# Altium PCB HT82V72_DEMOBOARD_V1_1.PcbDoc (part 1 of 2)
Units mil, origin at the board's own origin, x right, y up, seen from the top; angles counter-clockwise.
Board outline 2755.91 x 2047.24 mil, 4 copper layers (Top, 2-GND, 3-POWER, Bottom), stack 35.4 mil thick; 149 components, 103 nets, 424 pads, 256 vias.
Unrouted connection lines stored in the file: 3.
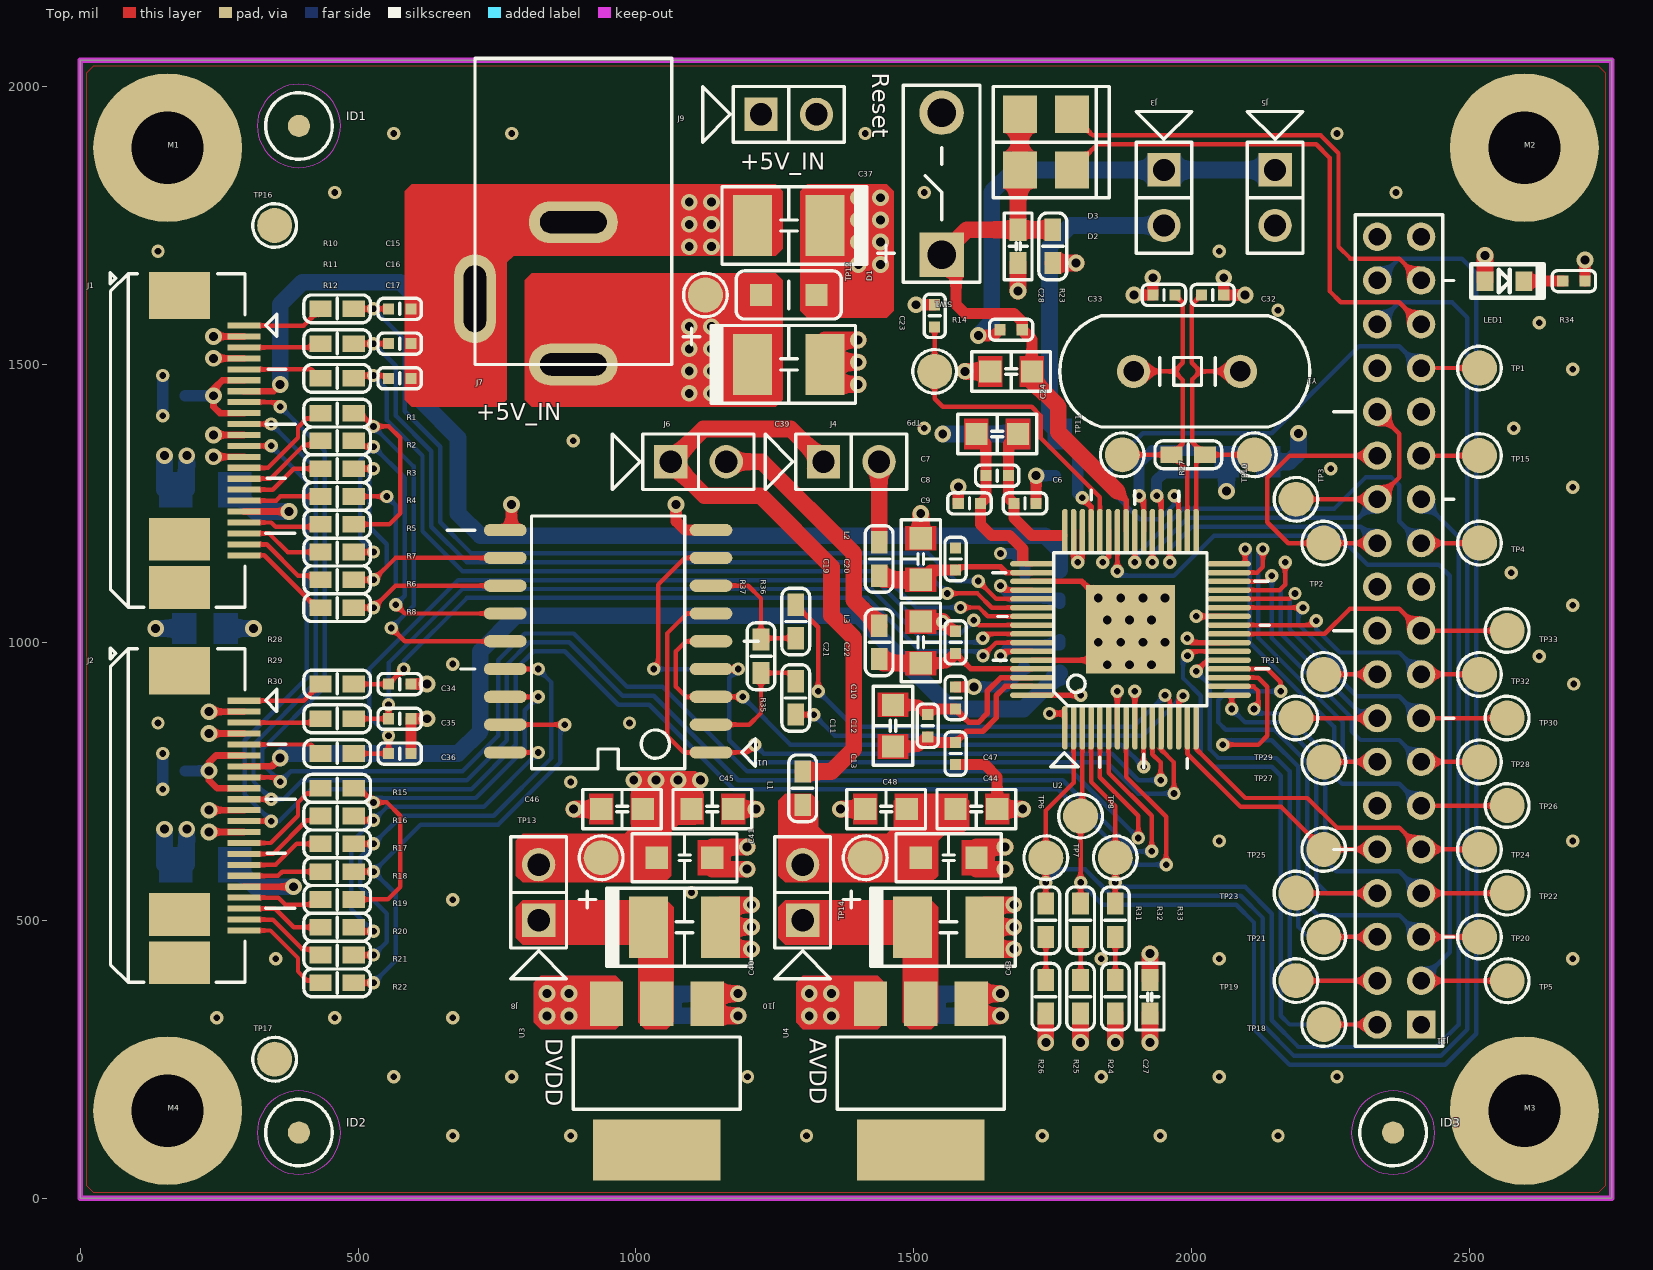
[diagram p0: Top view]
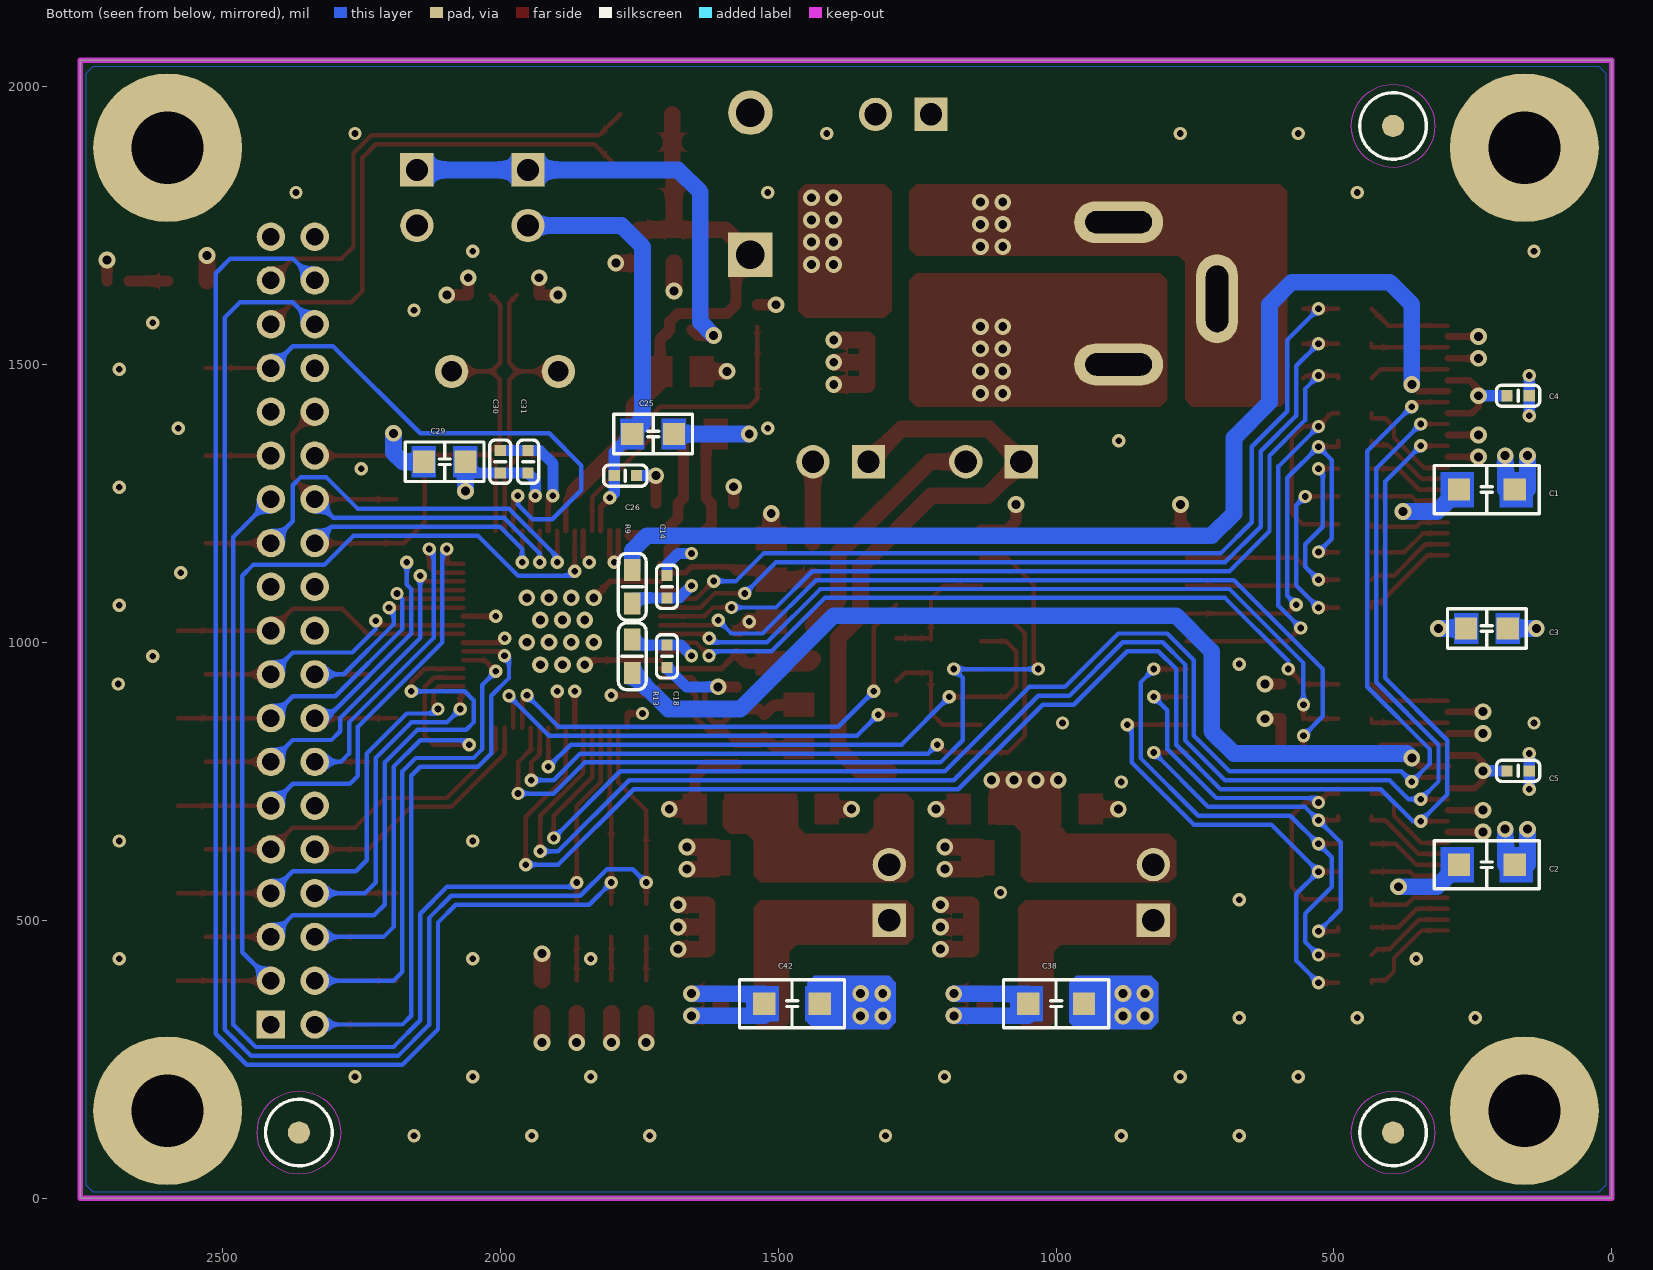
[diagram p1: Bottom view, seen from below]
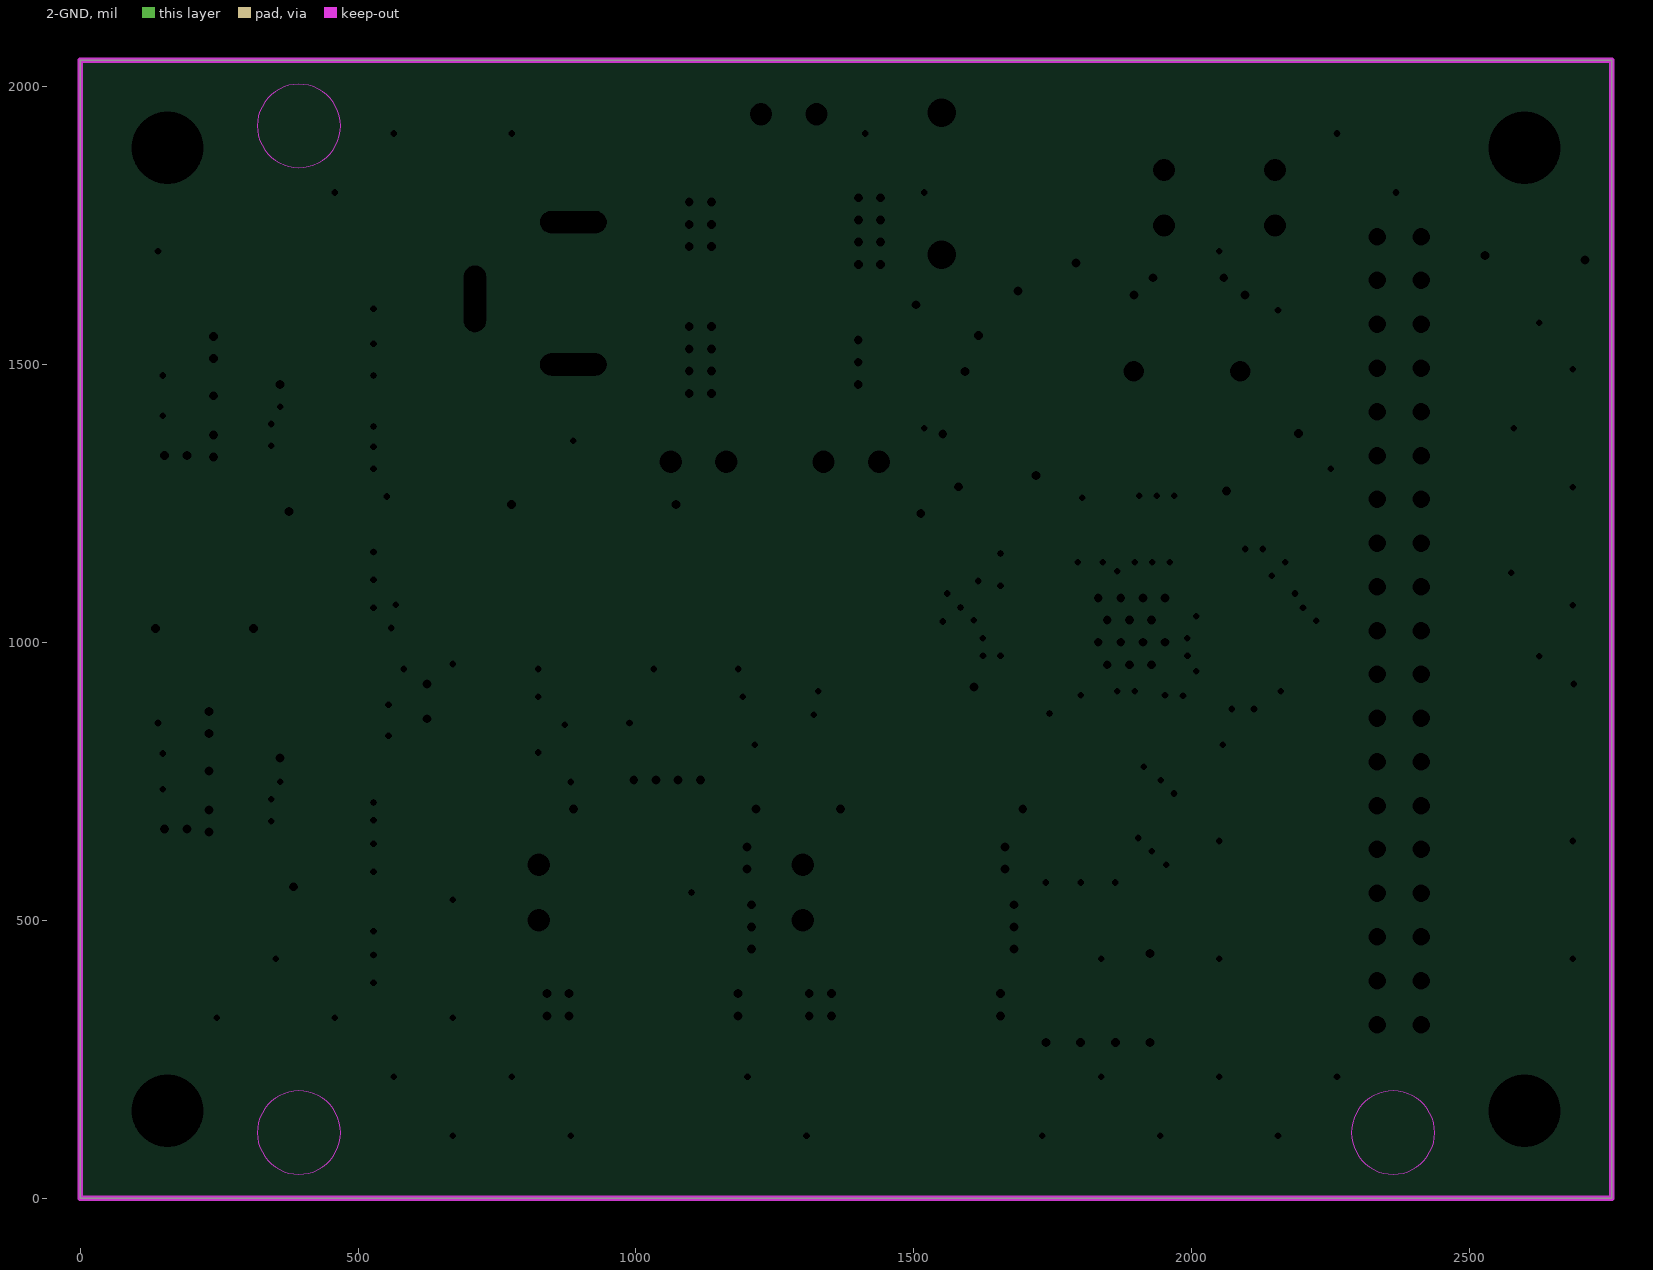
[diagram p2: 2-GND, clearances drawn from the general rule]
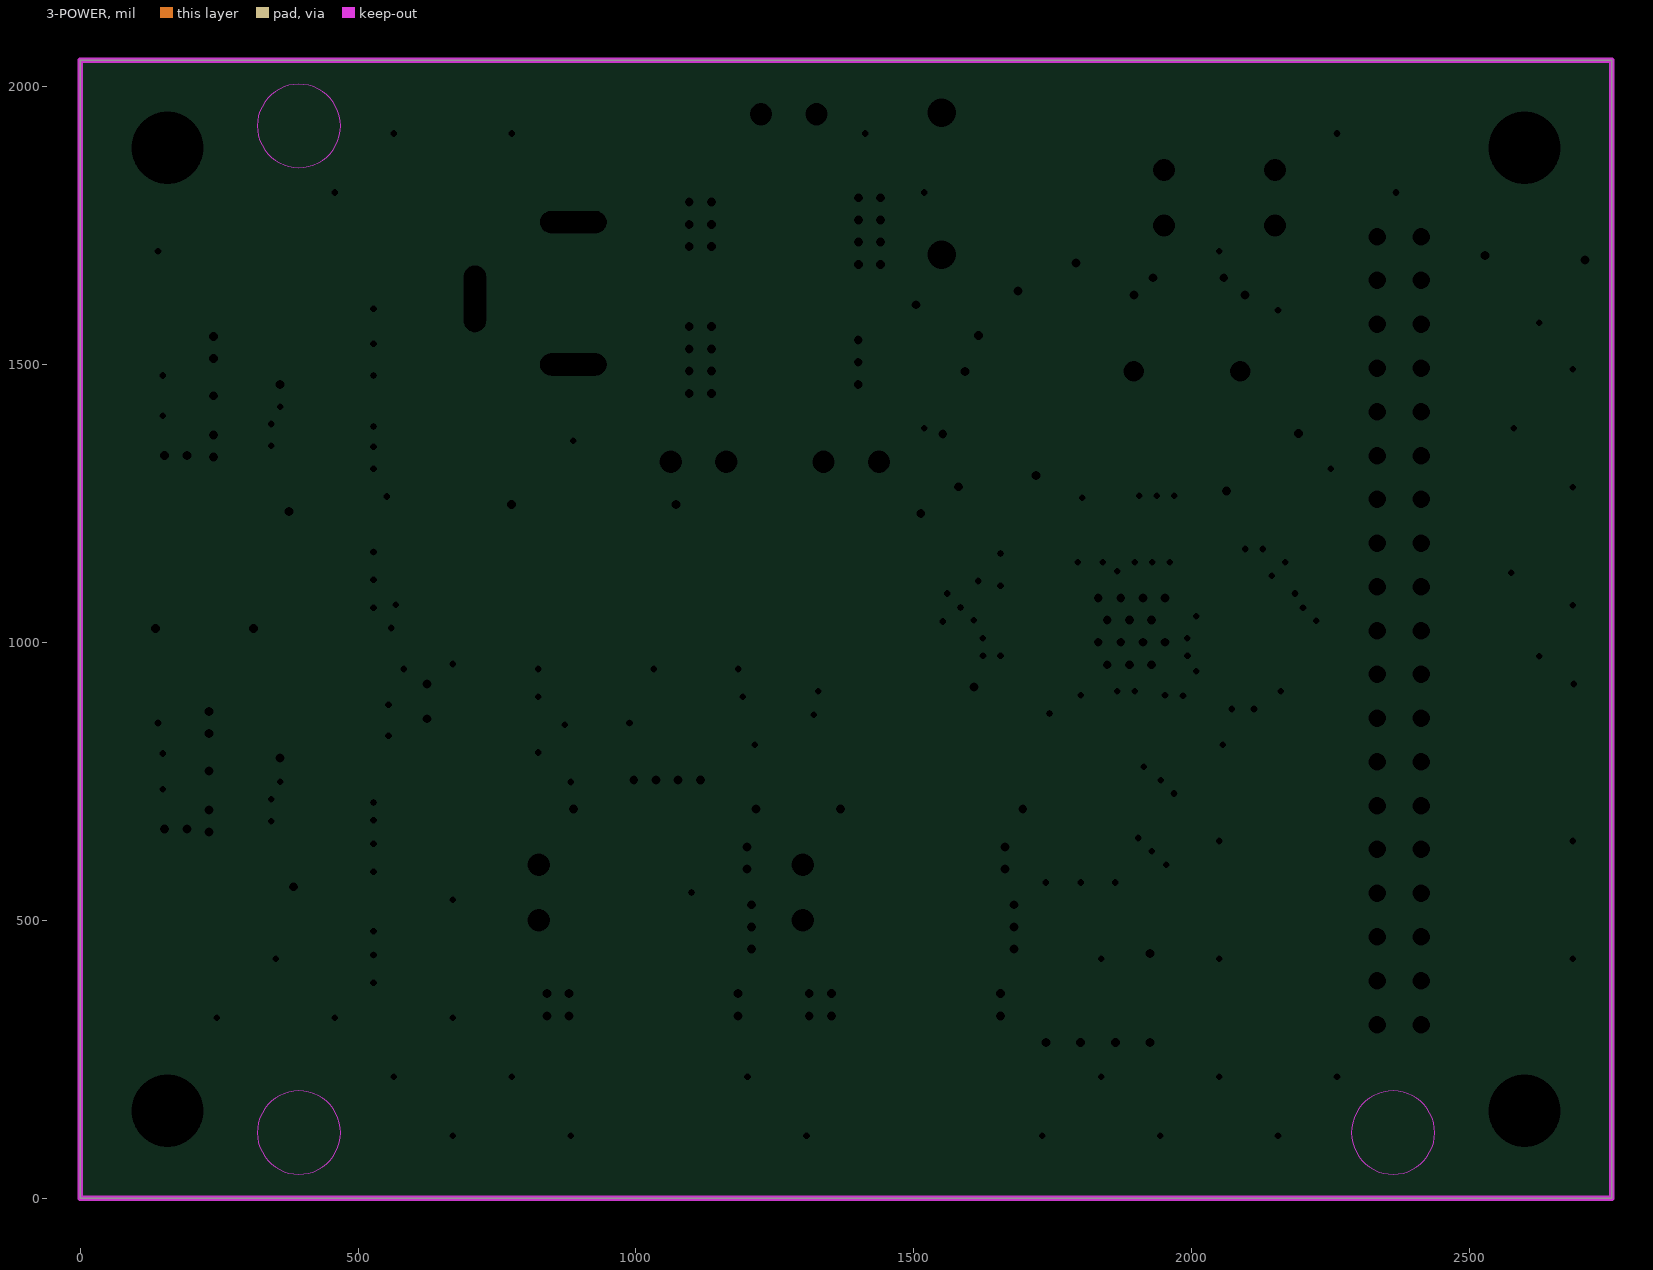
[diagram p3: 3-POWER, clearances drawn from the general rule]

## Layer stack, top to bottom
Solder Mask Top: solder mask 0.4, Solder Resist, Dk 3.5
Top: signal copper 1.35
Dielectric 1: dielectric 10, FR-4, Dk 4.3
2-GND: plane copper 1.35
Dielectric2: dielectric 10, FR-4, Dk 4.3
3-POWER: plane copper 1.35
Dielectric3: dielectric 10, FR-4, Dk 4.3
Bottom: signal copper 1.35
Solder Mask Bottom: solder mask 0.4, Solder Resist, Dk 3.5

## Board outline
0,0 2755.91,0 2755.91,2047.24 0,2047.24

## Design rules (kind name [scope] priority, off if disabled: settings)
Clearance "Clearance - Default - DEFAULT - Via" [IsVia vs IsVia] p1: gap=6 ignorepadtopadclearanceinfootprint=FALSE
Clearance "Clearance - Default - DEFAULT- SMD" [IsVia vs IsSMTPin] p2: gap=6 ignorepadtopadclearanceinfootprint=FALSE
Clearance "Clearance - Default - DEFAULT - Net" [All] p3: gap=5 ignorepadtopadclearanceinfootprint=FALSE except(0: Arc-Hole Track-Hole SMDPad-Hole THPad-Hole Via-Hole Fill-Hole Poly-Hole Region-Hole Text-Hole; 10: Arc-Fill Arc-Poly Arc-Region Track-Fill Track-Poly Track-Region SMDPad-Fill SMDPad-Poly SMDPad-Region THPad-Fill THPad-Poly THPad-Region Via-Fill Via-Poly Via-Region Text-Text; 25: Fill-Fill Fill-Poly Fill-Region Poly-Poly Poly-Region Region-Region)
ComponentClearance "ComponentClearance - Default - DEFAULT" [All] p1: gap=6 collisioncheckmode=3 verticalgap=10 showdistances=FALSE
FanoutControl Fanout_SOIC [IsSOIC] p1: bgadir=Out bgaviamode=Centered fanoutstyle=Auto fanoutdirection=Alternating viagrid=1 // Fanout_SOIC (Default Rule)
FanoutControl Fanout_Small [(CompPinCount < 5)] p2: bgadir=Out bgaviamode=Centered fanoutstyle=Auto fanoutdirection=OutThenIn viagrid=1 // Fanout_Small (Default Rule)
FanoutControl Fanout_LCC [IsLCC] p3: bgadir=Out bgaviamode=Centered fanoutstyle=Auto fanoutdirection=Alternating viagrid=1 // Fanout_LCC (Default Rule)
FanoutControl Fanout_BGA [IsBGA] p4: bgadir=Out bgaviamode=Centered fanoutstyle=Auto fanoutdirection=Alternating viagrid=1 // Fanout_BGA (Default Rule)
HoleToHoleClearance "HoleToHoleClearance - Default - DEFAULT" [All] p1: gap=6 allowstackedmicrovias=TRUE
Length "Default Length" [All] p1: maxlimit=50000 minlimit=0
MaxMinImpedance "Default Impedance" [All] p1: minimum=50.00 maximum=150.0
ParallelSegment "Default Parallel Segment Same Layer" [All] p1: limit=1000 gap=200
ParallelSegment "Default Parallel Segment Adjasent" [All] p2: limit=1000 gap=200
PlaneClearance [All] p1: clearance=20
PlaneConnect "Default PlaneConnect" [All] p1: planeconnectstyle=Relief reliefexpansion=20 reliefentries=0 reliefconductorwidth=15 reliefairgap=10
PolygonConnect "PolygonConnect - Default SMT" [IsSMTPin] p1: connectstyle=Relief reliefconductorwidth=10 reliefentries=4 polygonreliefangle="45 Angle" airgapwidth=10
PolygonConnect "PolygonConnect - Default Pad" [All] p2: connectstyle=Relief reliefconductorwidth=15 reliefentries=4 polygonreliefangle="45 Angle" airgapwidth=10
RoutingLayers "RoutingLayers - Default - DEFAULT" [All] p1: top layer_v5=TRUE bottom layer_v5=TRUE
RoutingPriority "RoutingPriority - Default - DEFAULT" [All] p1: routingpriority=3
RoutingTopology "Default Routing Topology" [All] p1: topology=Shortest
RoutingVias "RoutingVias - Default - DEFAULT" [All] p1: holewidth=12 width=24 viastyle="Through Hole" minholewidth=12 minwidth=24 maxholewidth=12 maxwidth=24
SMDToCorner "SMDToCorner - Default - DEFAULT" [All] p1: distance=60000
SolderMaskExpansion "SolderMaskExpansion from CAM settings" [All] p1: expansion=3
Width "Width - Net - RSTN" [InNet('RSTN') OR InNet('N16958578')] p1: maxlimit=100 minlimit=3 preferedwidth=30
Width "Width - Net - N16944684" [InNet('N16944684')] p2: maxlimit=100 minlimit=3 preferedwidth=30
Width "Width - Net - N16946003" [InNet('N16946003')] p3: maxlimit=100 minlimit=3 preferedwidth=30
Width "Width - NetClass - ClearanceClass_8(RuleSet)" [InNetClass('ClearanceClass_8(RuleSet)') OR InNetClass('ClearanceClass_11(RuleSet)')] p4: maxlimit=100 minlimit=3 preferedwidth=30
Width "Width - NetClass - ClearanceClass_7(RuleSet)" [InNetClass('ClearanceClass_7(RuleSet)') OR InNetClass('ClearanceClass_4(RuleSet)')] p5: maxlimit=100 minlimit=3 preferedwidth=30
Width "Width - NetClass - ClearanceClass_10(RuleSet)" [InNetClass('ClearanceClass_10(RuleSet)') OR InNetClass('30MIL-GND') OR InNetClass('30MIL-POWER')] p6: maxlimit=100 minlimit=3 preferedwidth=30
Width "Default Width" [All] p7: maxlimit=100 minlimit=3 preferedwidth=8
19 further rules are at their usual default settings.

## Classes and differential pairs
net class 30MIL-GND: GND
net class 30MIL-POWER: PVDD_3V3 PVDDREG_3V3 VCC_3V3 VCC_3V3_AVDD VCC_3V3A VCC_5V VCC_5V_UV
net class ClearanceClass_10(RuleSet): N16977037 N16977040
net class ClearanceClass_11(RuleSet): N16990104 N16994401
net class ClearanceClass_8(RuleSet): N16949181 N16949187
net class ClearanceClass_4(RuleSet): N16939040 N16949961 VREFA VREFB
net class ClearanceClass_7(RuleSet): N16948879 N16948881

## Components (designator, comment, footprint, x,y, rotation, side; value= is the part's Value field where it differs from the comment)
C1 "C1206" C1206 225,1275 r0 bottom
C2 "C1206" C1206 225,600 r0 bottom
C3 "C0805" C0805 225,1025 r180 bottom
C4 "C0402" C0402 168.75,1443.75 r180 bottom
C5 "C0402" C0402 168.75,768.75 r180 bottom
C6 "C0402" C0402 1700,1250 r0 top
C7 "C0805" C0805 1650,1375 r180 top
C8 "C0402" C0402 1650,1300 r180 top
C9 "C0402" C0402 1600,1250 r180 top
C10 "C0402" C0402 1575,900 r90 top
C11 "C0805" C0805 1462.5,850 r270 top
C12 "C0402" C0402 1525,850 r270 top
C13 "C0402" C0402 1575,800 r270 top
C14 "C0402" C0402 1700,1100 r90 bottom
C15 "C0402" C0402 575,1600 r0 top
C16 "C0402" C0402 575,1537.5 r0 top
C17 "C0402" C0402 575,1475 r0 top
C18 "C0402" C0402 1700,975 r270 bottom
C19 "C0805" C0805 1512.5,1150 r90 top
C20 "C0402" C0402 1575,1150 r90 top
C21 "C0805" C0805 1512.5,1000 r90 top
C22 "C0402" C0402 1575,1000 r90 top
C23 "C0402" C0402 1537.5,1587.5 r90 top
C24 "C0805" C0805 1675,1487.5 r180 top
C25 "C0805" C0805 1725,1375 r180 bottom
C26 "C0402" C0402 1775,1300 r180 bottom
C27 "C0603" C0603 1925,362.5 r90 top
C28 "C0603" C0603 1687.5,1712.5 r270 top
C29 "C0805" C0805 2100,1325 r0 bottom
C30 "C0402" C0402 2000,1325 r90 bottom
C31 "C0402" C0402 1950,1325 r90 bottom
C32 "C0402" C0402 2037.5,1625 r0 top
C33 "C0402" C0402 1950,1625 r180 top
C34 "C0402" C0402 575,925 r0 top
C35 "C0402" C0402 575,862.5 r0 top
C36 "C0402" C0402 575,800 r0 top
C37 "BCASE" BCASE 1275,1750 r180 top
C38 "C1206" C1206 1000,350 r0 bottom
C39 "BCASE" BCASE 1275,1500 r0 top
C40 "BCASE" BCASE 1087.5,487.5 r0 top
C41 "C1206" C1206 1087.5,612.5 r0 top
C42 "C1206" C1206 1475,350 r0 bottom
C43 "BCASE" BCASE 1562.5,487.5 r0 top
C44 "C1206" C1206 1562.5,612.5 r0 top
C45 "C0805" C0805 1137.5,700 r0 top
C46 "C0805" C0805 975,700 r180 top
C47 "C0805" C0805 1612.5,700 r0 top
C48 "C0805" C0805 1450,700 r180 top
D1 "R1206" R1206 1275,1625 r180 top
D2 "DO-214AC" DO-214AC 1737.5,1850 r180 top
D3 "DO-214AC" DO-214AC 1737.5,1950 r180 top
ID1 "VIA40N(F_MASK)4L" VIA40N(F_MASK)4L 393.7,1929.13 r0 top
ID2 "VIA40N(F_MASK)4L" VIA40N(F_MASK)4L 393.7,118.11 r0 top
ID3 "VIA40N(F_MASK)4L" VIA40N(F_MASK)4L 2362.2,118.11 r0 top
J1 "2218FLZ_RSM2" 2218FLZ_RSM2 200,1362.5 r0 top
J2 "2218FLZ_RSM2" 2218FLZ_RSM2 200,687.5 r0 top
J3 "SIP2" SIP2 1950,1850 r270 top
J4 "SIP2" SIP2 1337.5,1325 r0 top
J5 "SIP2" SIP2 2150,1850 r270 top
J6 "SIP2" SIP2 1062.5,1325 r0 top
J7 "DC-005" DC-005 887.5,1500 r0 top
J8 "SIP2" SIP2 825,500 r90 top
J9 "SIP2" SIP2 1225,1950 r0 top
J10 "SIP2" SIP2 1300,500 r90 top
J11 "CON$2F$19X2B$2F$2$2F$M" CON$2F$19X2B$2F$2$2F$M 2412.5,312.5 r90 top
L1 "R0603" R0603 1300,737.5 r270 top
L2 "R0603" R0603 1437.5,1150 r90 top
L3 "R0603" R0603 1437.5,1000 r90 top
LED1 "LED-0603-21" LED-0603-21 2562.5,1650 r0 top
M1 "H-3.3(6.8)" H-3.3(6.8) 157.48,1889.76 r0 top
M2 "H-3.3(6.8)" H-3.3(6.8) 2598.43,1889.76 r0 top
M3 "H-3.3(6.8)" H-3.3(6.8) 2598.43,157.48 r0 top
M4 "H-3.3(6.8)" H-3.3(6.8) 157.48,157.48 r0 top
R1 "R0603" R0603 462.5,1412.5 r0 top
R2 "R0603" R0603 462.5,1362.5 r0 top
R3 "R0603" R0603 462.5,1312.5 r0 top
R4 "R0603" R0603 462.5,1262.5 r0 top
R5 "R0603" R0603 462.5,1212.5 r0 top
R6 "R0603" R0603 462.5,1112.5 r0 top
R7 "R0603" R0603 462.5,1162.5 r0 top
R8 "R0603" R0603 462.5,1062.5 r0 top
R9 "R0603" R0603 1762.5,1100 r90 bottom
R10 "R0603" R0603 462.5,1600 r180 top
R11 "R0603" R0603 462.5,1537.5 r180 top
R12 "R0603" R0603 462.5,1475 r180 top
R13 "R0603" R0603 1762.5,975 r270 bottom
R14 "R0402" R0402 1675,1562.5 r0 top
R15 "R0603" R0603 462.5,737.5 r0 top
R16 "R0603" R0603 462.5,687.5 r0 top
R17 "R0603" R0603 462.5,637.5 r0 top
R18 "R0603" R0603 462.5,587.5 r0 top
R19 "R0603" R0603 462.5,537.5 r0 top
R20 "R0603" R0603 462.5,487.5 r0 top
R21 "R0603" R0603 462.5,437.5 r0 top
R22 "R0603" R0603 462.5,387.5 r0 top
R23 "R0603" R0603 1750,1712.5 r90 top
R24 "R0603" R0603 1862.5,362.5 r270 top
R25 "R0603" R0603 1800,362.5 r270 top
R26 "R0603" R0603 1737.5,362.5 r270 top
R27 "R0603" R0603 1993.75,1337.5 r180 top
R28 "R0603" R0603 462.5,925 r180 top
R29 "R0603" R0603 462.5,862.5 r180 top
R30 "R0603" R0603 462.5,800 r180 top
R31 "R0603" R0603 1737.5,500 r270 top
R32 "R0603" R0603 1800,500 r270 top
R33 "R0603" R0603 1862.5,500 r270 top
R34 "R0402" R0402 2687.5,1650 r0 top
R35 "R0603" R0603 1287.5,900 r270 top
R36 "R0603" R0603 1287.5,1037.5 r90 top
R37 "R0603" R0603 1225,975 r90 top
SW1 "SW-2P-6.5M" SW-2P-6.5M 1550,1825 r90 top
TP1 "TP$2F$1.6$2F$SMD" TP$2F$1.6$2F$SMD 2517.5,1493.45 r0 top
TP2 "TP$2F$1.6$2F$SMD" TP$2F$1.6$2F$SMD 2237.5,1178.59 r0 top
TP3 "TP$2F$1.6$2F$SMD" TP$2F$1.6$2F$SMD 2187.5,1257.42 r0 top
TP4 "TP$2F$1.6$2F$SMD" TP$2F$1.6$2F$SMD 2517.5,1178.6 r0 top
TP5 "TP$2F$1.6$2F$SMD" TP$2F$1.6$2F$SMD 2567.5,391.2 r0 top
TP6 "TP$2F$1.6$2F$SMD" TP$2F$1.6$2F$SMD 1737.5,612.5 r90 top
TP7 "TP$2F$1.6$2F$SMD" TP$2F$1.6$2F$SMD 1800,687.5 r90 top
TP8 "TP$2F$1.6$2F$SMD" TP$2F$1.6$2F$SMD 1862.5,612.5 r90 top
TP9 "TP$2F$1.6$2F$SMD" TP$2F$1.6$2F$SMD 1537.5,1487.5 r90 top
TP10 "TP$2F$1.6$2F$SMD" TP$2F$1.6$2F$SMD 2112.5,1337.5 r180 top
TP11 "TP$2F$1.6$2F$SMD" TP$2F$1.6$2F$SMD 1875,1337.5 r180 top
TP12 "TP$2F$1.6$2F$SMD" TP$2F$1.6$2F$SMD 1125,1625 r0 top
TP13 "TP$2F$1.6$2F$SMD" TP$2F$1.6$2F$SMD 937.5,612.5 r180 top
TP14 "TP$2F$1.6$2F$SMD" TP$2F$1.6$2F$SMD 1412.5,612.5 r180 top
TP15 "TP$2F$1.6$2F$SMD" TP$2F$1.6$2F$SMD 2517.5,1336.25 r0 top
TP16 "TP$2F$1.6$2F$SMD" TP$2F$1.6$2F$SMD 350,1750 r0 top
TP17 "TP$2F$1.6$2F$SMD" TP$2F$1.6$2F$SMD 350,250 r0 top
TP18 "TP$2F$1.6$2F$SMD" TP$2F$1.6$2F$SMD 2237.5,312.42 r0 top
TP19 "TP$2F$1.6$2F$SMD" TP$2F$1.6$2F$SMD 2187.5,391.47 r0 top
TP20 "TP$2F$1.6$2F$SMD" TP$2F$1.6$2F$SMD 2517.5,469.91 r0 top
TP21 "TP$2F$1.6$2F$SMD" TP$2F$1.6$2F$SMD 2237.5,469.91 r0 top
TP22 "TP$2F$1.6$2F$SMD" TP$2F$1.6$2F$SMD 2567.5,548.96 r0 top
TP23 "TP$2F$1.6$2F$SMD" TP$2F$1.6$2F$SMD 2187.5,548.96 r0 top
TP24 "TP$2F$1.6$2F$SMD" TP$2F$1.6$2F$SMD 2517.5,627.4 r0 top
TP25 "TP$2F$1.6$2F$SMD" TP$2F$1.6$2F$SMD 2237.5,627.4 r0 top
TP26 "TP$2F$1.6$2F$SMD" TP$2F$1.6$2F$SMD 2567.5,706.45 r0 top
TP27 "TP$2F$1.6$2F$SMD" TP$2F$1.6$2F$SMD 2237.5,784.89 r0 top
TP28 "TP$2F$1.6$2F$SMD" TP$2F$1.6$2F$SMD 2517.5,784.89 r0 top
TP29 "TP$2F$1.6$2F$SMD" TP$2F$1.6$2F$SMD 2187.5,863.94 r0 top
TP30 "TP$2F$1.6$2F$SMD" TP$2F$1.6$2F$SMD 2567.5,863.94 r0 top
TP31 "TP$2F$1.6$2F$SMD" TP$2F$1.6$2F$SMD 2237.5,942.38 r0 top
TP32 "TP$2F$1.6$2F$SMD" TP$2F$1.6$2F$SMD 2517.5,942.38 r0 top
TP33 "TP$2F$1.6$2F$SMD" TP$2F$1.6$2F$SMD 2567.5,1021.43 r0 top
U1 "SOP18$2F$9.4$2F$1.27M" SOP18$2F$9.4$2F$1.27M 950,1000 r90 top
U2 "TQFP64$2F$9$2F$0.4-EPAD" TQFP64$2F$9$2F$0.4-EPAD 1889.76,1023.62 r0 top
U3 "SOT-223" SOT-223 1037.5,350 r180 top
U4 "SOT-223" SOT-223 1512.5,350 r180 top
Y1 "XTAL3" XTAL3 2087.5,1487.5 r90 top

## Footprints (in the part's own frame and the unit in brackets; to place one, negate y for a bottom-side part, rotate by r counter-clockwise, add the part's x,y. Pads: shape width x height; smd on the part's side, far side on the other; paste and mask are expansions set on the pad)
2218FLZ_RSM2 [mil]
  rect 60x11 smd: 1(95,207.49) 2(95,187.81) 3(95,168.12) 4(95,148.44) 5(95,128.75) 6(95,109.07) 7(95,89.38) 8(95,69.7) 9(95,50.01) 10(95,30.33) 11(95,10.64) 12(95,-9.04) 13(95,-28.73) 14(95,-48.41) 15(95,-68.1) 16(95,-87.78) 17(95,-107.47) 18(95,-127.15) 19(95,-146.84) 20(95,-166.52) 21(95,-186.21) 22(95,-205.89)
  rect 110x85 smd: _(-21,261.5)
  rect 110x77 smd: _/2(-21,-177.14) _/3(-21,-263.88)
  silkscreen extent -146,-299 187,302
BCASE [mil]
  rect 70x110 smd: 1(-65,0) 2(65,0)
  silkscreen extent -190,-70 120,70
C0402 [mil]
  rect 20x20 smd: 1(-20,0) 2(20,0)
  silkscreen extent -39,-19 39,19
C0603 [mil]
  rect 40x30 smd: 1(-30,0) 2(30,0)
  silkscreen extent -60,-25 60,25
C0805 [mil]
  rect 40x40 smd: 1(-37.4,0) 2(37.4,0)
  Top region: -59.06,27.56 -15.75,27.56 -15.75,-27.56 -59.06,-27.56 -59.06,27.56
  Top region: 59.06,-27.56 15.75,-27.56 15.75,27.56 59.06,27.56 59.06,-27.56
  Top pour cut-out: -15.35,34.65 -15.35,-33.46 16.14,-33.46 16.14,34.65 -15.35,34.65
  silkscreen extent -71,-35 71,35
C1206 [mil]
  rect 40x40 smd: 1(-50,0) 2(50,0)
  Top region: -23.62,31.5 -23.62,-31.5 -82.68,-31.5 -82.68,31.5 -23.62,31.5
  Top region: 23.62,-31.5 23.62,31.5 82.68,31.5 82.68,-31.5 23.62,-31.5
  silkscreen extent -94,-43 94,43
CON$2F$19X2B$2F$2$2F$M [mm]
  rect 1.3x1.3 hole 0.8: 1(0,0)
  round 1.3 hole 0.8: 2(0,2) 3(2,0) 4(2,2) 5(4,0) 6(4,2) 7(6,0) 8(6,2) 9(8,0) 10(8,2) 11(10,0) 12(10,2) 13(12,0) 14(12,2) 15(14,0) 16(14,2) 17(16,0) 18(16,2) 19(18,0) 20(18,2) 21(20,0) 22(20,2) 23(22,0) 24(22,2) 25(24,0) 26(24,2) 27(26,0) 28(26,2) 29(28,0) 30(28,2) 31(30,0) 32(30,2) 33(32,0) 34(32,2) 35(34,0) 36(34,2) 37(36,0) 38(36,2)
  silkscreen extent -1,-1.5 37,4
DC-005 [mil]
  oval 160x75 hole 40 slot 120 at 0 deg: 1(0,0) 2(0,255.91)
  oval 75x160 hole 40 slot 120 at 90 deg: 3(-177.17,118.11)
  silkscreen extent -177,0 177,551
DO-214AC [mm]
  rect 1.55x1.7 smd: 1(1.19,0) 2(-1.19,0)
  silkscreen extent -2.9,-1.27 2.4,1.27
H-3.3(6.8) [mm]
  round 6.8 hole 3.3: 1(0,0)
LED-0603-21 [mil]
  rect 30x35 smd: 1(-35,0) 2(35,0)
  silkscreen extent -60,-30 71,30
R0402 [mil]
  rect 20x20 smd: 1(-20,0) 2(20,0)
  silkscreen extent -39,-19 39,19
R0603 [mil]
  rect 40x30 smd: 1(-30,0) 2(30,0)
  silkscreen extent -60,-25 60,25
R1206 [mil]
  rect 40x40 smd: 1(-50,0) 2(50,0)
  Top region: -23.62,31.5 -23.62,-31.5 -82.68,-31.5 -82.68,31.5 -23.62,31.5
  Top region: 23.62,-31.5 23.62,31.5 82.68,31.5 82.68,-31.5 23.62,-31.5
  silkscreen extent -94,-43 94,43
SIP2 [mil]
  rect 60x60 hole 40: 1(0,0)
  round 60 hole 40: 2(100,0)
  silkscreen extent -105,-50 150,50
SOP18$2F$9.4$2F$1.27M [mm]
  oval 0.559x1.95 smd: 1(-5.03,-4.7) 2(-3.76,-4.7) 3(-2.49,-4.7) 4(-1.22,-4.7) 5(0.05,-4.7) 6(1.32,-4.7) 7(2.59,-4.7) 8(3.86,-4.7) 9(5.13,-4.7) 10(5.13,4.7) 11(3.86,4.7) 12(2.59,4.7) 13(1.32,4.7) 14(0.05,4.7) 15(-1.22,4.7) 16(-2.49,4.7) 17(-3.76,4.7) 18(-5.03,4.7)
  silkscreen extent -5.77,-6.86 5.77,7.37
SOT-223 [mil]
  rect 60x80 smd: 1(-90.55,0) 2(0,0) 3(90.55,0)
  rect 230x110 smd: 4(0,263)
  silkscreen extent -150,60 150,190
SW-2P-6.5M [mil]
  rect 80x80 / inner round 80 / far side rect 80x80 hole 51.18: 1(-127.95,0)
  round 80 hole 51.18: 2(127.95,0)
  silkscreen extent -177,-69 177,69
TP$2F$1.6$2F$SMD [mm]
  round 1.6 smd: 1(0,0)
  silkscreen extent -1,-1 1,1
TQFP64$2F$9$2F$0.4-EPAD [mm]
  oval 0.254x2 smd: 1(-3,-4.5) 2(-2.6,-4.5) 3(-2.2,-4.5) 4(-1.8,-4.5) 5(-1.4,-4.5) 6(-1,-4.5) 7(-0.6,-4.5) 8(-0.2,-4.5) 9(0.2,-4.5) 10(0.6,-4.5) 11(1,-4.5) 12(1.4,-4.5) 13(1.8,-4.5) 14(2.2,-4.5) 15(2.6,-4.5) 16(3,-4.5) 33(3,4.5) 34(2.6,4.5) 35(2.2,4.5) 36(1.8,4.5) 37(1.4,4.5) 38(1,4.5) 39(0.6,4.5) 40(0.2,4.5) 41(-0.2,4.5) 42(-0.6,4.5) 43(-1,4.5) 44(-1.4,4.5) 45(-1.8,4.5) 46(-2.2,4.5) 47(-2.6,4.5) 48(-3,4.5)
  oval 2x0.254 smd: 17(4.5,-3.012) 18(4.5,-2.612) 19(4.5,-2.212) 20(4.5,-1.812) 21(4.5,-1.412) 22(4.5,-1.012) 23(4.5,-0.612) 24(4.5,-0.212) 25(4.5,0.188) 26(4.5,0.588) 27(4.5,0.988) 28(4.5,1.388) 29(4.5,1.788) 30(4.5,2.188) 31(4.5,2.588) 32(4.5,2.988) 49(-4.5,2.988) 50(-4.5,2.588) 51(-4.5,2.188) 52(-4.5,1.788) 53(-4.5,1.388) 54(-4.5,0.988) 55(-4.5,0.588) 56(-4.5,0.188) 57(-4.5,-0.212) 58(-4.5,-0.612) 59(-4.5,-1.012) 60(-4.5,-1.412) 61(-4.5,-1.812) 62(-4.5,-2.212) 63(-4.5,-2.612) 64(-4.5,-3.012)
  rect 4.06x4.06 smd: 65(0,0)
  silkscreen extent -6.31,-6.35 6.35,6.35
VIA40N(F_MASK)4L [mil]
  round 40 all layers, no hole mask+40: 1(0,0)
  Keep-Out Layer pour cut-out: 75,0 69.29,28.7 53.03,53.03 28.7,69.29 0,75 0,75 -28.7,69.29 -53.03,53.03 -69.29,28.7 -75,0 -75,0 -69.29,-28.7 -53.03,-53.03 -28.7,-69.29 0,-75 0,-75 28.7,-69.29 53.03,-53.03 69.29,-28.7 75,0
  silkscreen extent -60,-60 60,60
XTAL3 [mil]
  round 60 hole 37: 1(0,0) 2(0,192.13)
  silkscreen extent -100,-125 100,325

## Via types
v1: diameter 24, hole 12, Top to Bottom, 140 vias
v2: diameter 30, hole 16, Top to Bottom, 116 vias

## Nets (pads, with @x,y where several pads share a name; then routed paths per layer and width w, separated by ;. In a path a pad name is that pad's centre, name@x,y a point inside that pad or via, vN(x,y) a via of type N, cw(c..) or ccw(c..) an arc to the next point about the centre after c; other vN are vias at no path point)
CIS_BLED: U1.4 U1.8 U2.12 | length 1573.6
  Top w8: v1(1032,951.97) 1040,959.97 1040,1104 1087.97,1151.97 U1.8@1135.04,1151.97 ; U1.4@1135.04,951.97 v1(1184,951.97) ; U2.12@1944.88,846.46 1944.88,807.12 1968,784 v1(1968,728)
  Bottom w8: v1(1032,951.97) v1(1184,951.97) 1168,935.97 1168,824 1208,784 1848,784 1904,728 v1(1968,728)
CIS_CLK: J1.12 J2.12 U2.8 | length 3117.2
  Top w8: J2.12@295,678.46 v1(344,678.46) ; J1.12@295,1353.46 v1(344,1353.46) ; U2.8@1881.89,846.46 1881.89,758.11 1953.89,686.11 v1(1953.89,600)
  Bottom w8: v1(344,1353.46) 408,1289.46 408,936 296,824 296,726.46 v1(344,678.46) 358.46,678.46 416,736 704,736 784,816 784,952 816,984 872,984 968,888 1024,888 1176,736 1760,736 1896,600 v1(1953.89,600)
CIS_GLED: U1.3 U1.5 U2.10 | length 1106
  Top w8: U1.5@1135.04,1001.97 1089.97,1001.97 1072,984 1072,920 1090.03,901.97 U1.3@1135.04,901.97 v1(1192,901.97) ; v1(1913.39,776) U2.10@1913.39,846.46
  Bottom w8: v1(1192,901.97) 1277.97,816 1873.39,816 v1(1913.39,776)
CIS_IRLED: R36.2 U2.13 | length 908
  Top w8: R36.2@1287.5,1067.5 1328,1027 v1(1328,912) ; v1(1952,904.63) 1960.63,896 U2.13@1960.63,846.46
  Bottom w8: v1(1328,912) 1392,848 1895.37,848 v1(1952,904.63)
CIS_MODE: J1.8 J2.8 U2.5 | length 3018.2
  Top w8: J2.8@295,757.2 352,757.2 v1(360,749.2) ; J1.8@295,1432.2 352,1432.2 v1(360,1424.2) ; U2.5@1834.65,846.46 1834.65,757.35 1904,688 v1(1904,648)
  Bottom w8: v1(360,1424.2) 440,1344.2 440,920 328,808 328,781.2 v1(360,749.2) 378.8,768 688,768 752,832 752,968 800,1016 888,1016 984,920 1048,920 1200,768 1784,768 v1(1904,648)
CIS_RLED: U1.1 U1.6 U2.11 | length 1311.3
  Top w8: U1.6@1135.04,1051.97 1091.97,1051.97 1056,1016 1056,832 1086.03,801.97 U1.1@1135.04,801.97 1200,801.97 v1(1214.03,816) ; U2.11@1929.13,846.46 1929.13,798.87 1944,784 v1(1944,752)
  Bottom w8: v1(1214.03,816) 1230.03,800 1856,800 1904,752 v1(1944,752)
CIS_SP: J1.10 J2.10 U2.6 | length 3056.7
  Top w8: J2.10@295,717.83 v1(344,717.83) ; J1.10@295,1392.83 v1(344,1392.83) ; U2.6@1850.39,846.46 1850.39,765.61 1928,688 v1(1928,624)
  Bottom w8: v1(344,1392.83) 424,1312.83 424,928 312,816 312,749.83 v1(344,717.83) 365.83,717.83 400,752 696,752 768,824 768,960 808,1000 880,1000 976,904 1032,904 1184,752 1768,752 1896,624 v1(1928,624)
CIS_UVLED: R35.2 U2.14 | length 803.3
  Top w8: R35.2@1287.5,870 v1(1320,870) ; U2.14@1976.38,846.46 1976.38,896 v1(1984.38,904)
  Bottom w8: v1(1320,870) 1358,832 1912.38,832 v1(1984.38,904)
FRAME_START: J11.23 TP4.1 U2.40 | length 857.4
  Top w8: v1(1897.64,1144) U2.40@1897.64,1200.79 ; J11.23@2412.5,1178.64 2529.96,1178.64 TP4.1@2517.5,1178.6
  Bottom w8: v1(1897.64,1144) 1897.64,1153.64 1984,1240 2256,1240 2312.75,1296.75 2359.25,1296.75 2373.13,1282.87 2373.13,1218.01 J11.23@2412.5,1178.64
GND: C1.1 C2.1 C3.2 C4.2 C5.2 C6.2 C9.2 C10.2 C13.2 C14.2 C15.2 C16.2 C17.2 C18.2 C19.2 C20.2 C21.2 C22.2 C23.2 C24.2 C25.2 C26.2 C27.2 C28.2 C29.2 C30.2 C31.2 C32.2 C33.2 C34.2 C35.2 C36.2 C37.2 C38.2 C39.2 C40.2 C41.2 C42.2 C43.2 C44.2 C45.2 C46.2 C47.2 C48.2 J1.2 J1.4 J1.11 J2.2 J2.4 J2.11 J7.2 J7.3 J9.2 J11.1 J11.12 J11.20 J11.21 J11.22 J11.29 J11.32 R34.2 SW1.2 TP16.1 TP17.1 U1.9 U2.9 U2.26 U2.39 U2.43 U2.46 U2.47 U2.51 U2.60 U2.64 U2.65 U3.1 U4.1 | length 5547.6
  Top w10: U2.64@1712.6,905.04 v1(1800,905.04) ; U2.60@1712.6,968.03 1839.73,968.03 v2(1847.95,959.81) ; U2.51@1712.6,1109.76 1802.15,1109.76 v2(1831.81,1080.11) ; U2.47@1787.4,1200.79 1787.4,1151.6 v1(1795,1144) 1803.15,1152.15 U2.46@1803.15,1200.79 ; v1(1840,1144) 1850.39,1154.39 U2.43@1850.39,1200.79 ; U2.9@1897.64,846.46 v1(1897.64,912) ; v1(1905.39,1264) 1913.39,1256 U2.39@1913.39,1200.79 ; v1(2008,1046.77) U2.26@2066.93,1046.77
  Top w12: v2(232,698.14) J2.11@295,698.14 ; v2(232,835.94) J2.4@295,835.94 ; v2(232,875.31) J2.2@295,875.31 ; v2(240,1373.14) J1.11@295,1373.14 ; v2(240,1510.94) J1.4@295,1510.94 ; v2(240,1550.31) J1.2@295,1550.31
  Top w20: C36.2@595,800 C35.2@595,862.5 v2(624,862.5) ; C34.2@595,925 v2(624,925) ; C17.2@595,1475 C16.2@595,1537.5 C15.2@595,1600 710.33,1600 J7.3@710.33,1618.11 ; v2(1072,1248) 1072,1217.97 1088,1201.97 U1.9@1135.04,1201.97 ; v2(1504,1607.5) C23.2@1537.5,1607.5 ; v1(1552,1037.4) 1569.4,1020 C22.2@1575,1020 ; C13.2@1575,780 1628,780 1649.9,758.1 C47.2@1649.9,700 ; C10.2@1575,920 v2(1608,920) ; C9.2@1580,1250 v2(1580,1280) ; C6.2@1720,1250 v2(1720,1300) ; v2(1896,1625) C33.2@1930,1625 v2(1930,1656) ; v2(2057.5,1656) C32.2@2057.5,1625 v2(2096,1625) ; R34.2@2707.5,1650 v2(2707.5,1688)
  Top w30: v2(888,700) C46.2@937.6,700 ; C45.2@1174.9,700 v2(1216,700) ; v2(1184,328) 1128.05,328 U3.1@1128.05,350 1128.05,368 v2(1184,368) ; v2(1200,592) 1137.5,592 C41.2@1137.5,612.5 1137.5,632 v2(1200,632) ; v2(1208,448) 1152.5,448 C40.2@1152.5,487.5 C40.2@1152.5,488 ; v2(1208,488) C40.2@1152.5,488 ; v2(1208,528) 1152.5,528 C40.2@1152.5,488 ; v2(1368,700) C48.2@1412.6,700 ; v2(1400,1464) 1340,1464 C39.2@1340,1500 C39.2@1340,1504 ; v2(1400,1504) C39.2@1340,1504 ; v2(1400,1544) 1340,1544 C39.2@1340,1504 ; C21.2@1512.5,1037.4 v1(1552,1037.4) ; C19.2@1512.5,1187.4 v2(1512.5,1232) ; v2(1592,1487.5) C24.2@1637.6,1487.5 ; C47.2@1649.9,700 v2(1696,700) ; v2(1656,328) 1603.05,328 U4.1@1603.05,350 1603.05,368 v2(1656,368) ; v2(1664,592) 1612.5,592 C44.2@1612.5,612.5 1612.5,632 v2(1664,632) ; v2(1680,448) 1627.5,448 C43.2@1627.5,487.5 C43.2@1627.5,488 ; v2(1680,488) C43.2@1627.5,488 ; v2(1680,528) 1627.5,528 C43.2@1627.5,488 ; v2(1687.5,1632) C28.2@1687.5,1682.5 ; C27.2@1925,392.5 v2(1925,440)
  Bottom w20: v1(148.75,736) C5.2@148.75,768.75 v1(148.75,800) ; v1(148.75,1408) C4.2@148.75,1443.75 v1(148.75,1480) ; v2(1608,920) 1665,920 C18.2@1700,955 ; v1(1656,1160) 1680,1160 1700,1140 C14.2@1700,1120 ; v2(1720,1300) C26.2@1755,1300 ; v1(1905.39,1264) 1905.39,1321.39 1929,1345 C31.2@1950,1345 C30.2@2000,1345
  Bottom w30: v2(136,1025) C3.2@187.6,1025 ; v2(152,664) 152,600 C2.1@175,600 192,600 v2(192,664) ; v2(152,1336) 152,1275 C1.1@175,1275 192,1275 v2(192,1336) ; v2(1184,328) 1050,328 C38.2@1050,350 1050,368 v2(1184,368) ; v2(1552,1375) C25.2@1687.6,1375 ; v2(1656,328) 1525,328 C42.2@1525,350 1525,368 v2(1656,368) ; C29.2@2137.4,1325 2176,1325 2192,1341 v2(2192,1376)
  other v1: 670.36,112.41 882.5,112.41 1306.76,112.41 1731.02,112.41 1943.16,112.41 2155.29,112.41 564.3,218.48 776.43,218.48 1200.69,218.48 1837.09,218.48 2049.22,218.48 2261.35,218.48 246.1,324.54 458.23,324.54 670.36,324.54 352.17,430.61 1837.09,430.61 2049.22,430.61 2685.62,430.61 670.36,536.68 1100,550 2049.22,642.74 2685.62,642.74 882.5,748.81 140.03,854.87 988.56,854.87 2687.5,925 670.36,960.94 2625,975 2685.62,1067.01 2575,1125 2685.62,1279.14 2250,1312.5 887.5,1362.5 1518.89,1385.2 2579.55,1385.2 2685.62,1491.27 2625,1575 2155.29,1597.34 140.03,1703.4 2049.22,1703.4 458.23,1809.47 1518.89,1809.47 2367.42,1809.47 564.3,1915.53 776.43,1915.53 1412.83,1915.53 2261.35,1915.53
  other v2: 1887.92,959.81 1927.9,959.81 1831.81,1000.16 1872.17,1000.16 1912.14,1000.16 1952.11,1000.16 1847.95,1040.14 1887.92,1040.14 1927.9,1040.14 1872.17,1080.11 1912.14,1080.11 1952.11,1080.11 1096,1712 1136,1712 1096,1752 1136,1752 1096,1792 1136,1792
LED_BAN: R3.2 R6.2 U1.11 | length 550.4
  Top w8: R6.2@492.5,1112.5 v1(528,1112.5) 567.47,1151.97 U1.11@764.96,1151.97 ; R3.2@492.5,1312.5 v1(528,1312.5)
  Bottom w8: v1(528,1112.5) 551.5,1136 551.5,1176.5 520,1208 520,1304.5 v1(528,1312.5)
LED_BBN: R17.2 R21.2 U1.15 | length 923.7
  Top w8: R21.2@492.5,437.5 v1(528,437.5) ; R17.2@492.5,637.5 v1(528,637.5) ; U1.15@764.96,951.97 v1(824,951.97)
  Bottom w8: v1(528,437.5) 552,461.5 552,512 504,560 504,613.5 v1(528,637.5) 578.5,688 744,688 848,792 848,927.97 v1(824,951.97)
LED_GAN: R1.2 R5.2 U1.14 | length 953.3
  Top w8: R5.2@492.5,1212.5 556.5,1212.5 576,1232 576,1368 555.5,1388.5 v1(528,1388.5) 504,1412.5 R1.2@492.5,1412.5 ; v1(560,1025.97) 584,1001.97 U1.14@764.96,1001.97
  Bottom w8: v1(528,1388.5) 600,1316.5 600,1065.97 v1(560,1025.97)
LED_GBN: R15.2 R19.2 U1.16 | length 805.1
  Top w8: R19.2@492.5,537.5 553.5,537.5 576,560 576,688 552,712 v1(528,712) 512,728 492.5,728 R15.2@492.5,737.5 ; U1.16@764.96,901.97 v1(824,901.97)
  Bottom w8: v1(528,712) 536,720 712,720 800,808 800,877.97 v1(824,901.97)
LED_IRAN: R4.2 R8.2 U1.12 | length 571.5
  Top w8: R8.2@492.5,1062.5 v1(528,1062.5) 567.47,1101.97 U1.12@764.96,1101.97 ; R4.2@492.5,1262.5 v1(552,1262.5)
  Bottom w8: v1(528,1062.5) 568,1102.5 568,1246.5 v1(552,1262.5)
LED_IRBN: R18.2 R22.2 U1.17 | length 899.9
  Top w8: R22.2@492.5,387.5 v1(528,387.5) ; R18.2@492.5,587.5 v1(528,587.5) ; U1.17@764.96,851.97 v1(872,851.97)
  Bottom w8: v1(528,387.5) 568,427.5 568,547.5 v1(528,587.5) 612.5,672 752,672 864,784 864,843.97 v1(872,851.97)
LED_RAN: R2.2 R7.2 U1.13 | length 808.3
  Top w8: R7.2@492.5,1162.5 v1(528,1162.5) ; R2.2@492.5,1362.5 492.5,1352 v1(528,1352) ; v1(568,1067.97) 584,1051.97 U1.13@764.96,1051.97
  Bottom w8: v1(528,1162.5) 504,1186.5 504,1328 v1(528,1352) 584,1296 584,1083.97 v1(568,1067.97)
LED_RBN: R16.2 R20.2 U1.18 | length 724.7
  Top w8: R20.2@492.5,487.5 492.5,480 v1(528,480) ; R16.2@492.5,687.5 492.5,680 v1(528,680) ; U1.18@764.96,801.97 v1(824,801.97)
  Bottom w8: v1(528,480) 488,520 488,640 v1(528,680) 552,704 726.03,704 v1(824,801.97)
MAIN_RES: D2.2 J11.33 | length 921.9
  Top w8: D2.2@1784.35,1850 1830.35,1896 2224,1896 2248,1872 2248,1632 2268.29,1611.71 2373.13,1611.71 J11.33@2412.5,1572.34
MCLK: J11.3 TP5.1 U2.42 | length 1663.6
  Top w8: v1(1866.14,1128) U2.42@1866.14,1200.79 ; J11.3@2412.5,391.24 2579.96,391.24 TP5.1@2567.5,391.2
  Bottom w8: v1(1866.14,1128) 1874.14,1120 1968,1120 2040,1192 2264,1192 2316.73,1139.27 2444.73,1139.27 2464,1120 2464,442.74 J11.3@2412.5,391.24
MODULE_RST: D3.2 J11.35 | length 850.4
  Top w8: D3.2@1784.35,1950 1822.35,1912 2232,1912 2264,1880 2264,1712 2285.55,1690.45 2373.13,1690.45 J11.35@2412.5,1651.08
N16780809: J1.20 R7.1 | length 151.4
  Top w8: J1.20@295,1195.98 340.02,1195.98 373.5,1162.5 R7.1@432.5,1162.5
N16780811: J1.19 R5.1 | length 145.2
  Top w8: J1.19@295,1215.66 344,1215.66 351.66,1208 432.5,1208 R5.1@432.5,1212.5
N16780820: J1.22 R8.1 | length 182
  Top w8: J1.22@295,1156.61 331.39,1156.61 416,1072 432.5,1072 R8.1@432.5,1062.5
N16780822: J1.21 R6.1 | length 163.9
  Top w8: J1.21@295,1176.29 335.71,1176.29 392,1120 425,1120 R6.1@432.5,1112.5
N16781081: J2.19 R19.1 | length 152.2
  Top w8: J2.19@295,540.66 356.84,540.66 369.5,528 432.5,528 R19.1@432.5,537.5
N16781089: J2.22 R22.1 | length 193.2
  Top w8: J2.22@295,481.61 342.39,481.61 392,432 392,408 408,392 432.5,392 R22.1@432.5,387.5
N16781091: J2.21 R21.1 | length 163.9
  Top w8: J2.21@295,501.29 346.71,501.29 400,448 422,448 R21.1@432.5,437.5
N16781093: J2.20 R20.1 | length 151.4
  Top w8: J2.20@295,520.98 351.02,520.98 384.5,487.5 R20.1@432.5,487.5
N16781321: J2.17 R18.1 | length 140.6
  Top w8: J2.17@295,580.03 356.03,580.03 363.5,587.5 R18.1@432.5,587.5
N16781333: J2.16 R17.1 | length 153.1
  Top w8: J2.16@295,599.72 351.72,599.72 389.5,637.5 R17.1@432.5,637.5
N16781335: J2.14 R15.1 | length 197.9
  Top w8: J2.14@295,639.09 343.09,639.09 392,688 392,712 408,728 432.5,728 R15.1@432.5,737.5
N16781345: J2.15 R16.1 | length 170.1
  Top w8: J2.15@295,619.4 347.4,619.4 408,680 432.5,680 R16.1@432.5,687.5
N16781422: J1.16 R3.1 | length 153.1
  Top w8: J1.16@295,1274.72 346.72,1274.72 384.5,1312.5 R3.1@432.5,1312.5
N16781426: J1.17 R4.1 | length 140.6
  Top w8: J1.17@295,1255.03 352.53,1255.03 360,1262.5 R4.1@432.5,1262.5
N16781428: J1.15 R2.1 | length 170.1
  Top w8: J1.15@295,1294.4 342.4,1294.4 403,1355 432.5,1355 R2.1@432.5,1362.5
N16781430: J1.14 R1.1 | length 195
  Top w8: J1.14@295,1314.09 338.09,1314.09 392,1368 392,1387 408,1403 432.5,1403 R1.1@432.5,1412.5
N16939040: C14.1 R9.1 U2.52 | length 185.5
  Top w10: v1(1656,1102.02) 1664,1094.02 U2.52@1712.6,1094.02
  Bottom w20: v1(1656,1102.02) 1678.02,1080 C14.1@1700,1080 1762.5,1080 R9.1@1762.5,1070
N16943587: C23.1 TP9.1 U2.44 | length 583.5
  Top w8: C23.1@1537.5,1567.5 TP9.1@1537.5,1487.5 1537.5,1438.5 1552,1424 1712,1424 1728,1408 1728,1368 1834.65,1261.35 U2.44@1834.65,1200.79
N16944684: C19.1 C20.1 L2.1 U2.50 | length 292.2
  Top w10: C20.1@1575,1130 1581,1136 1656,1136 1666.49,1125.51 U2.50@1712.6,1125.51
  Top w20: C19.1@1512.5,1112.6 1529.9,1130 C20.1@1575,1130
  Top w30: L2.1@1437.5,1120 1444.9,1112.6 C19.1@1512.5,1112.6